# Altium PCB differential receiver.PcbDoc
Units mm, origin at the board's own origin, x right, y up, seen from the top; angles counter-clockwise.
Board outline 58 x 48 mm, 4 copper layers (Top Layer, Layer 1, Layer 2, Bottom Layer), stack 1.585 mm thick; 35 components, 22 nets, 115 pads, 79 vias.
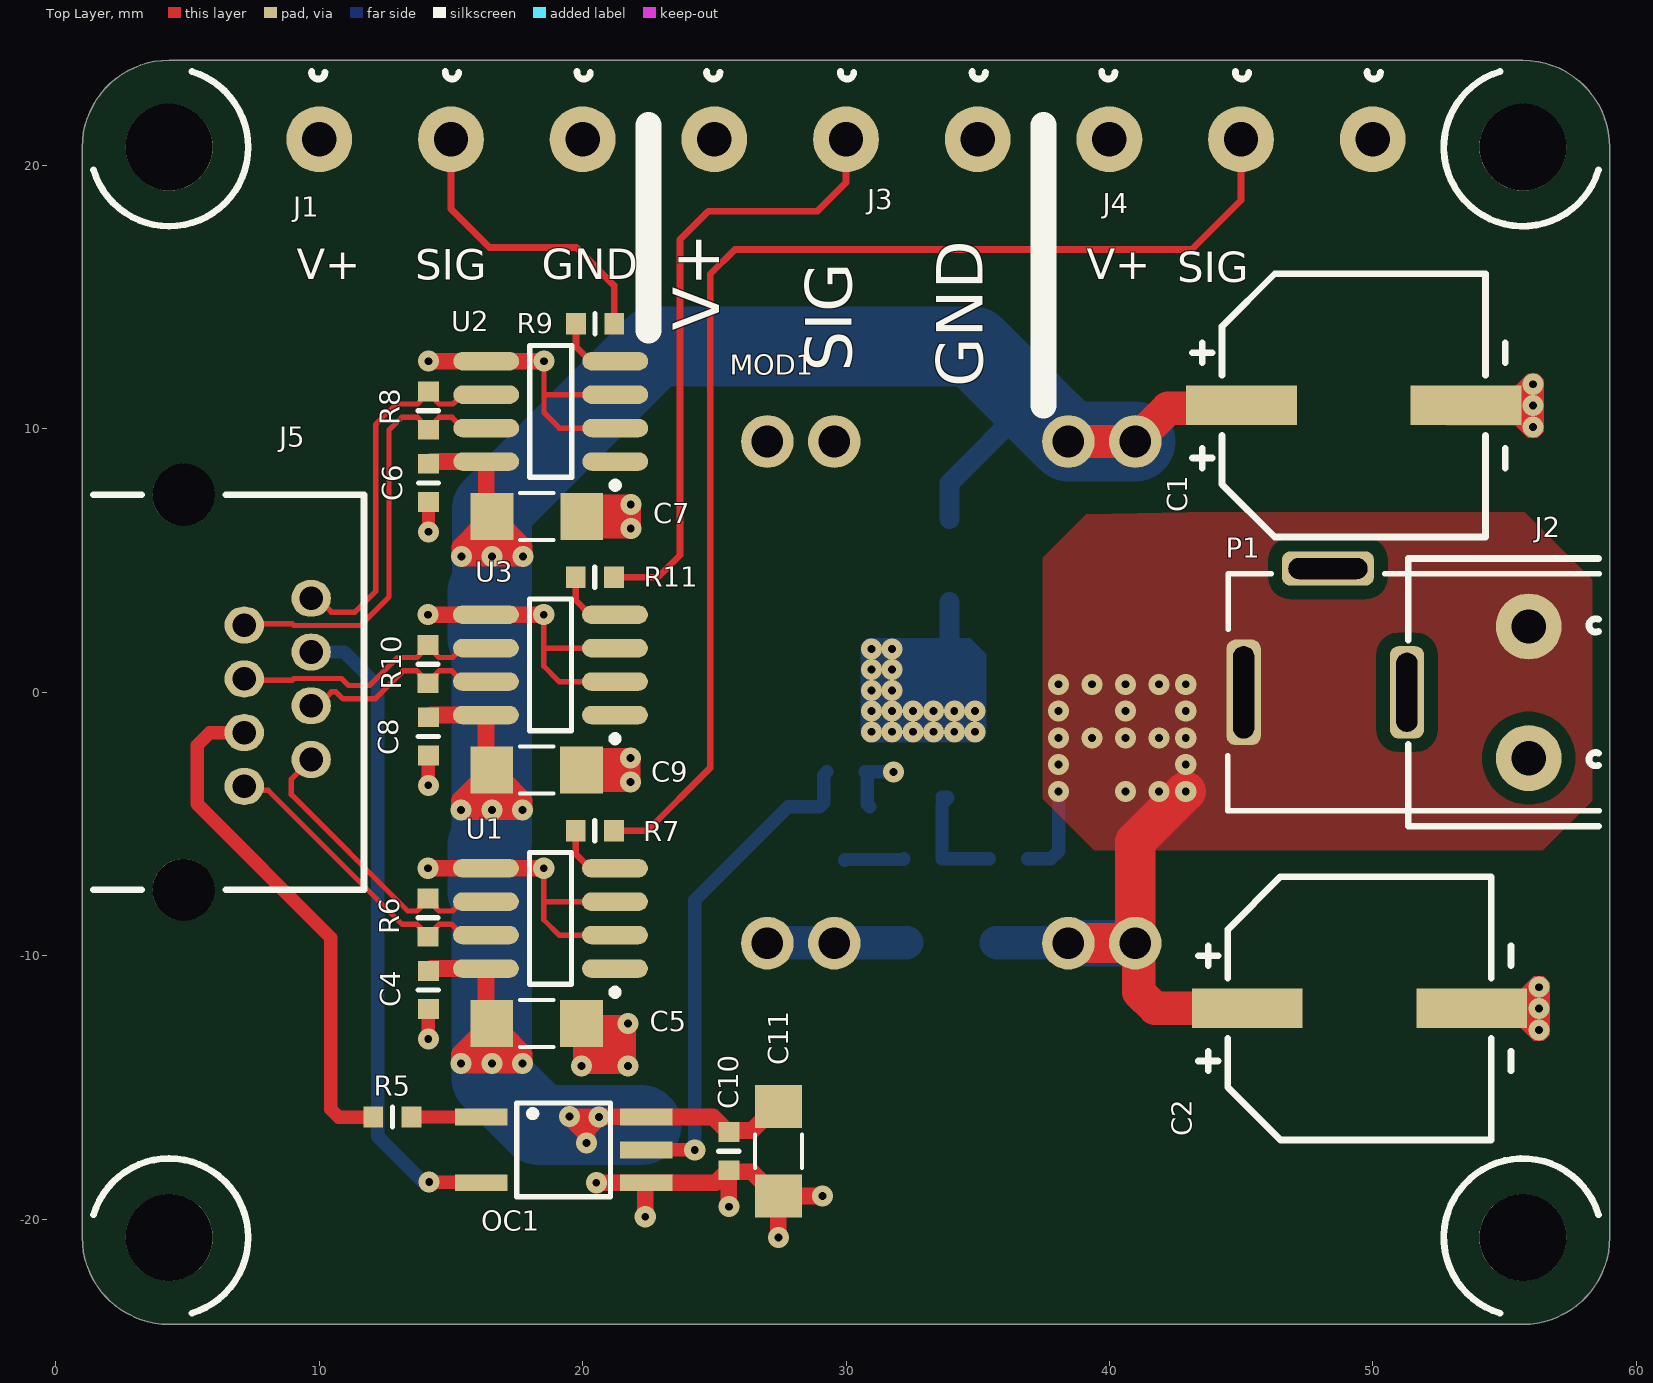
[diagram p0: Top Layer view]
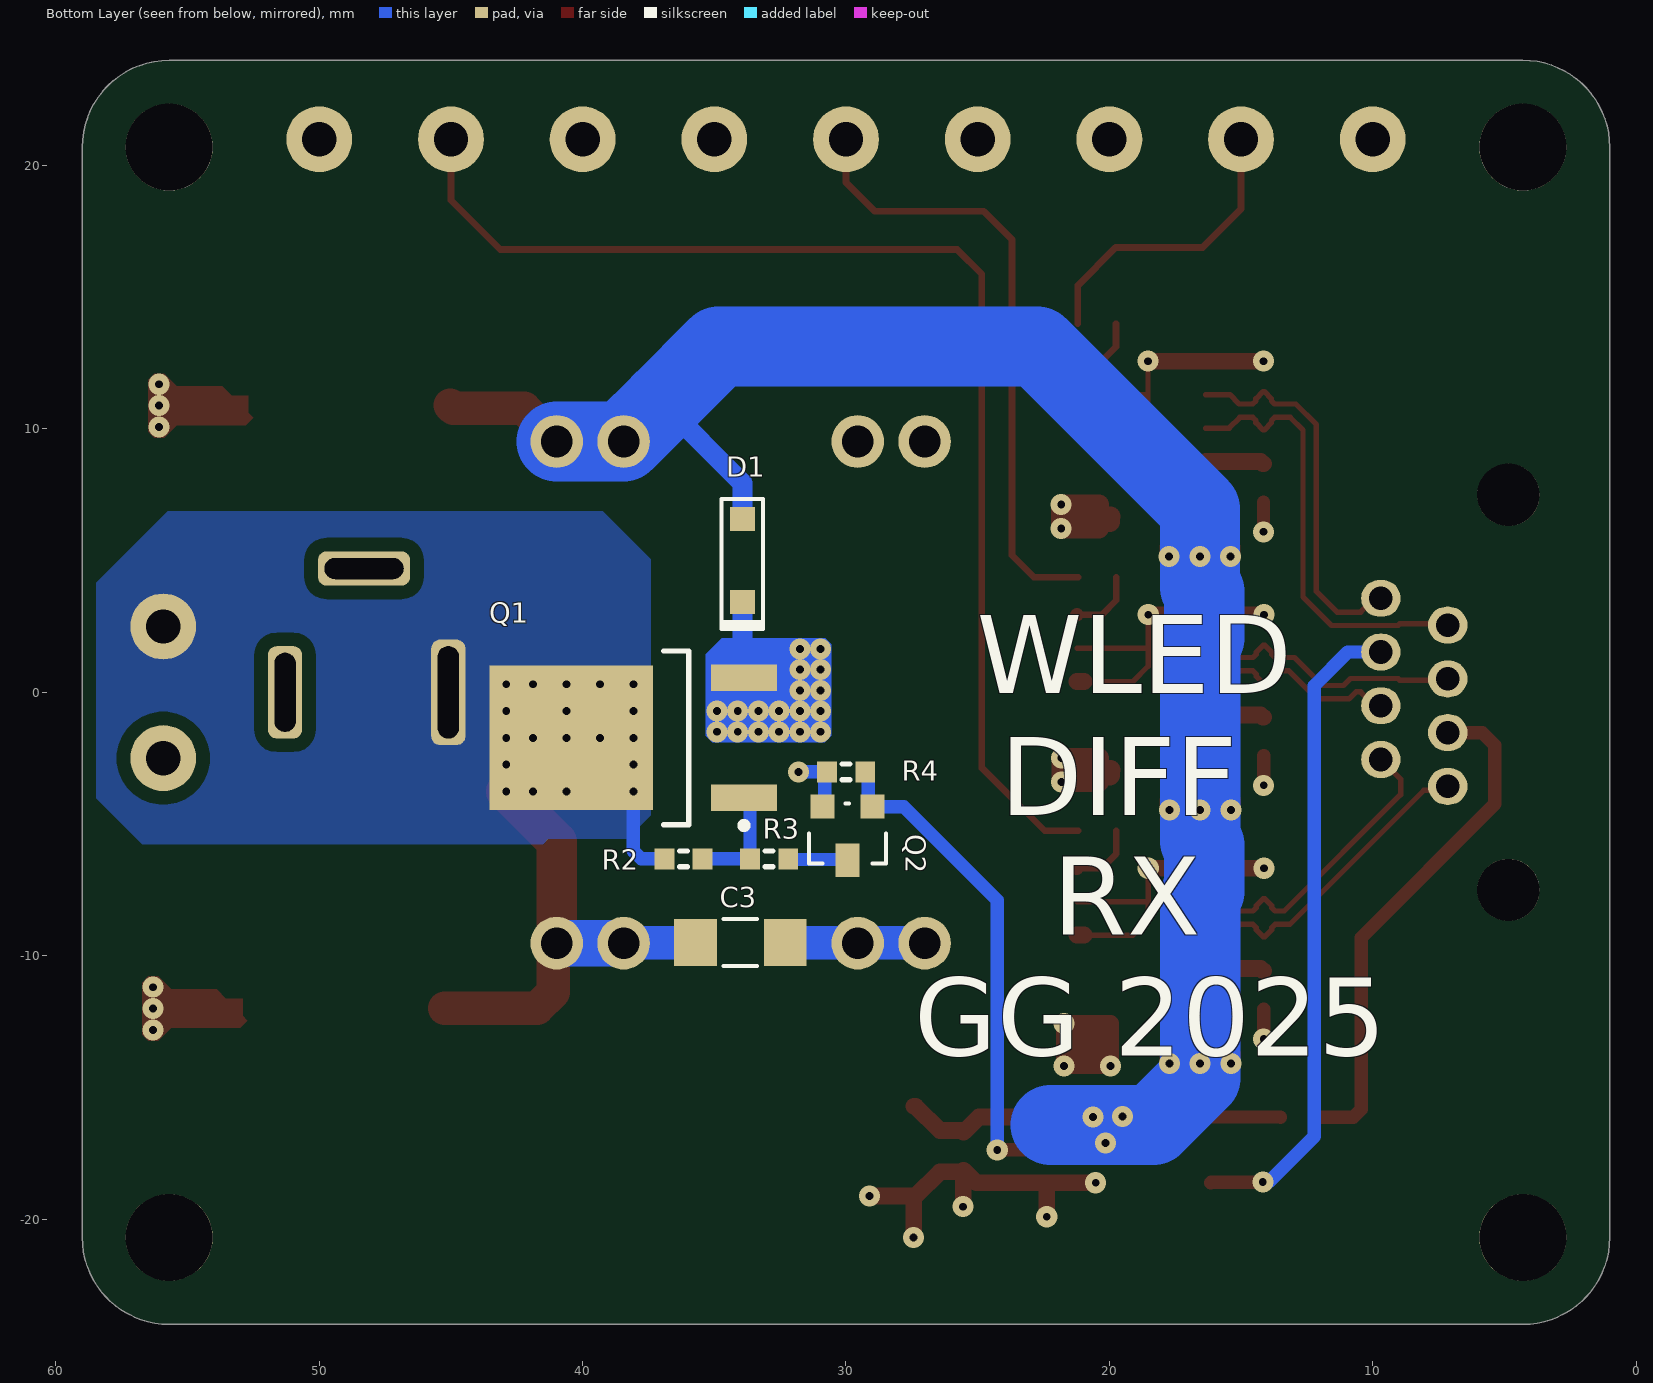
[diagram p1: Bottom Layer view, seen from below]
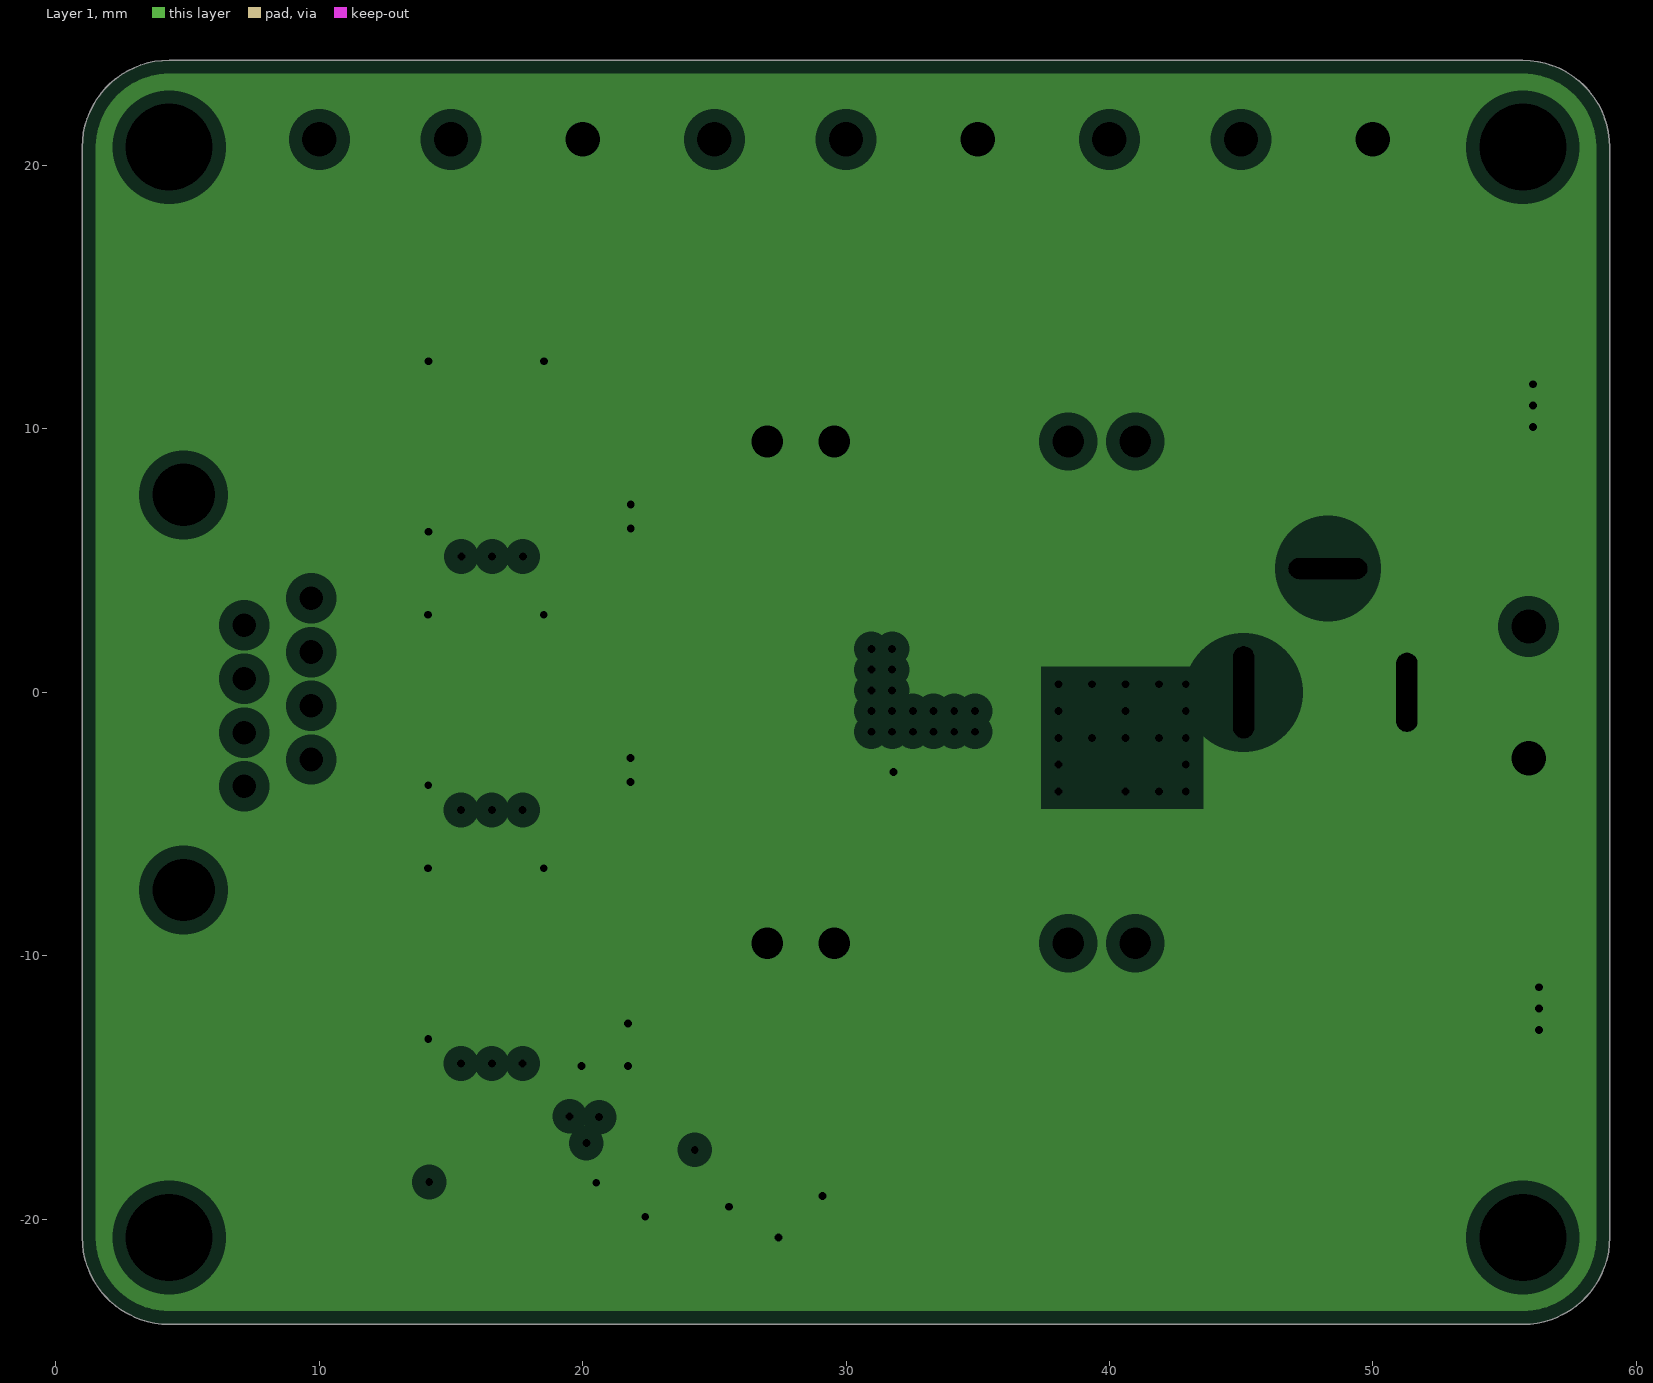
[diagram p2: Layer 1, clearances drawn from the general rule]
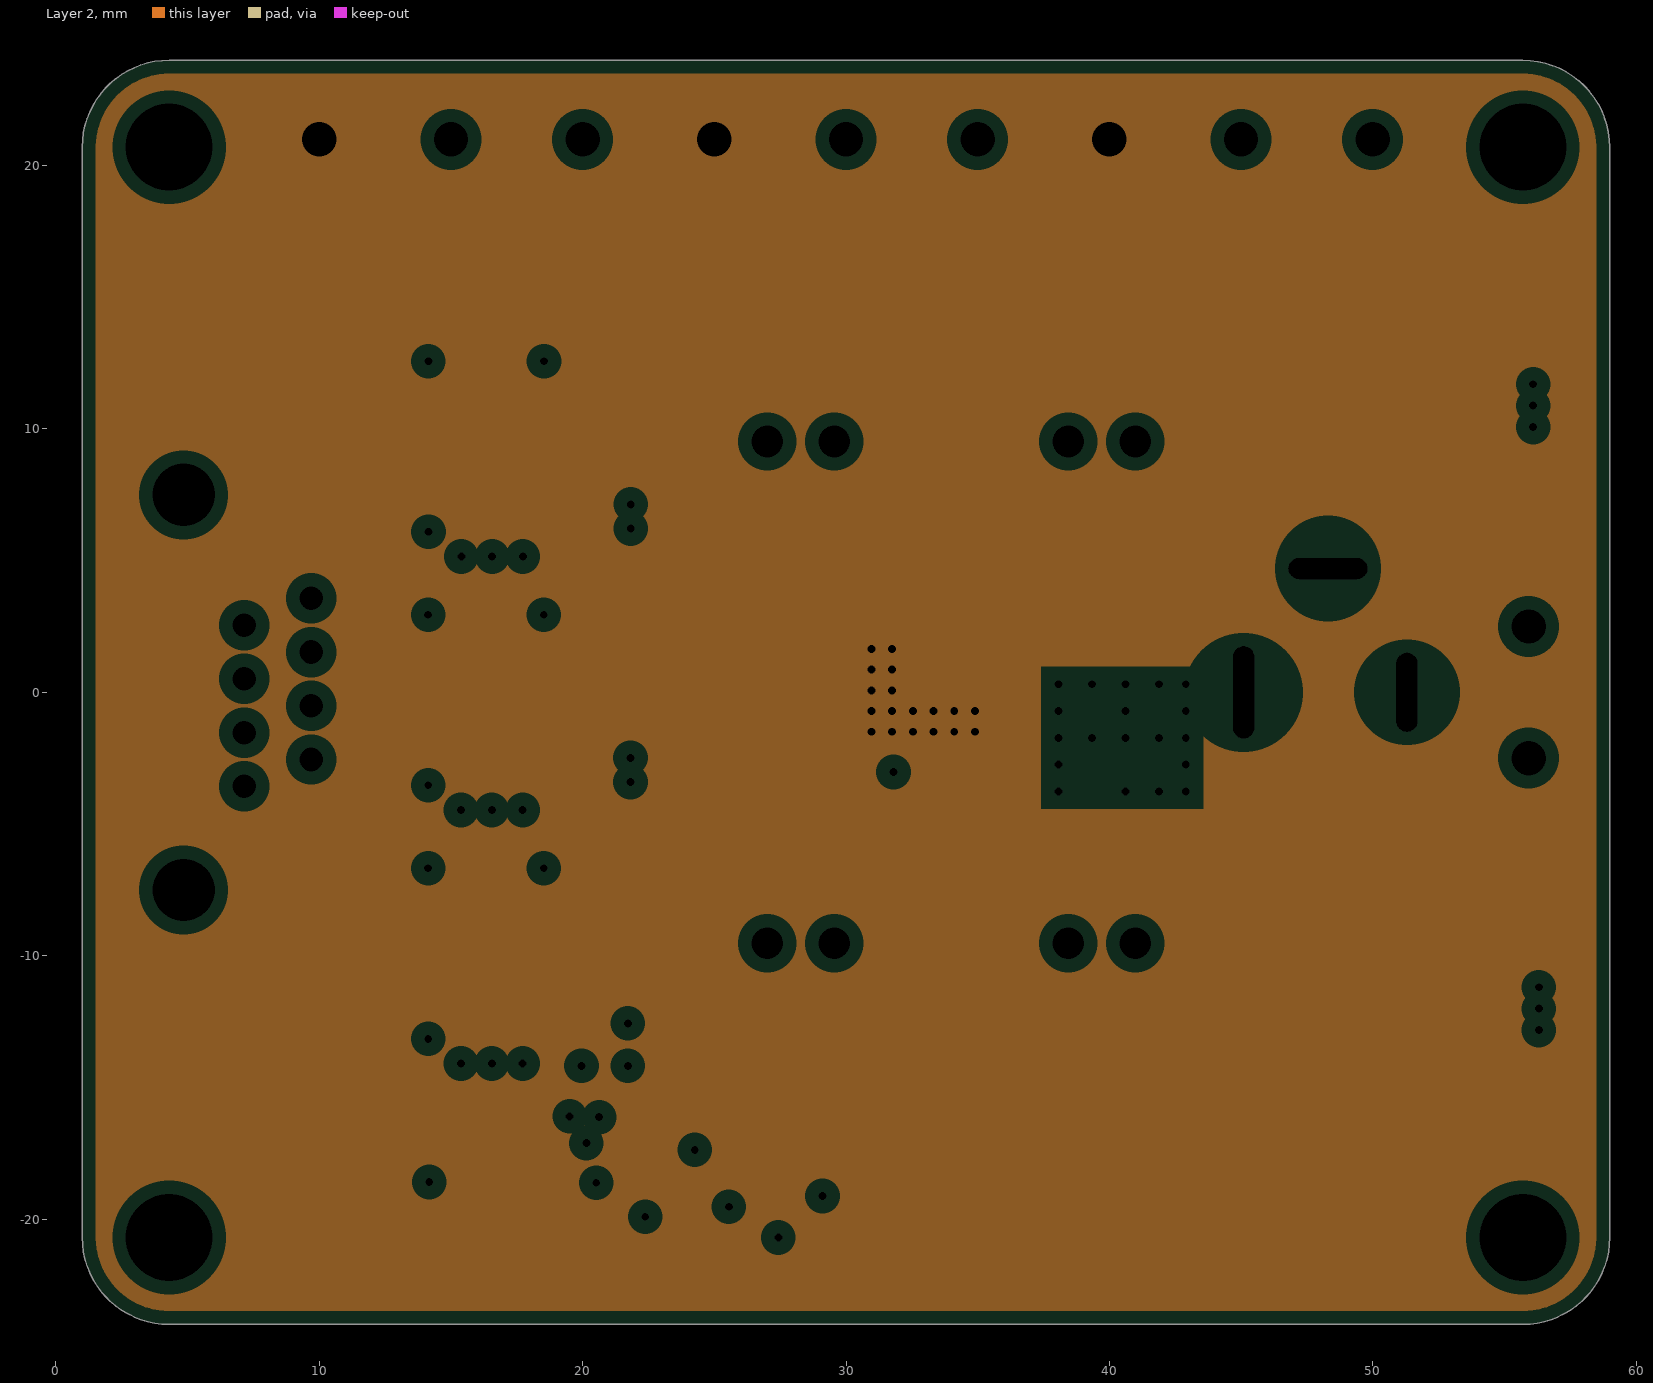
[diagram p3: Layer 2, clearances drawn from the general rule]
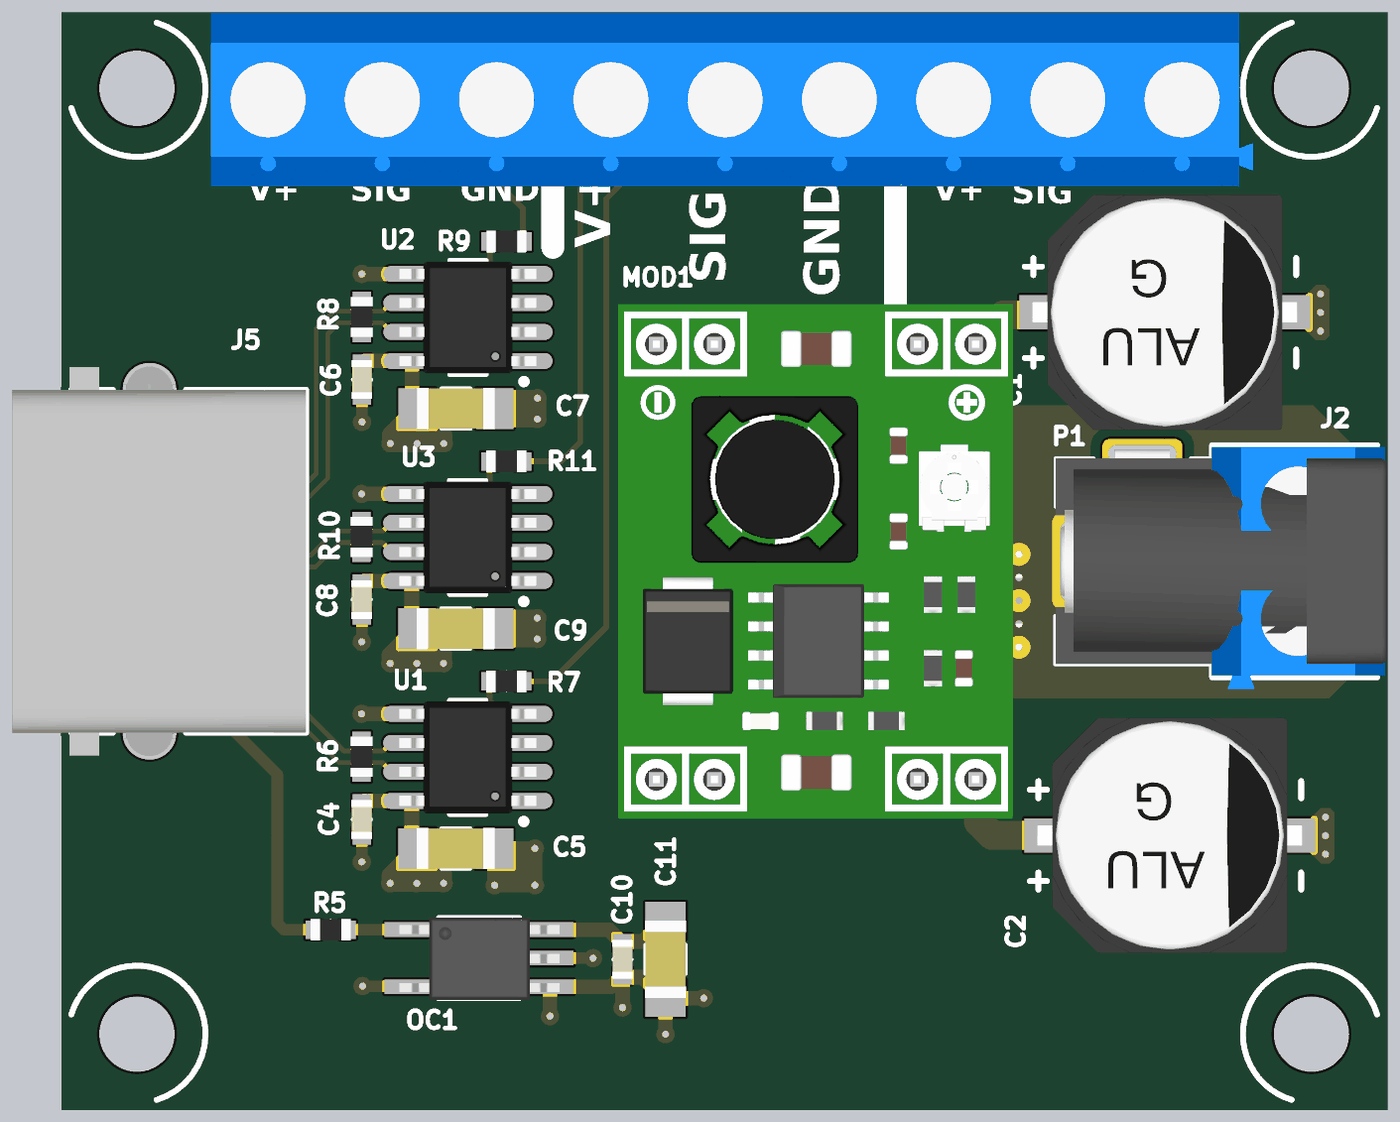
[diagram p4: 3D render of the assembled board from above, using the file's embedded part models]
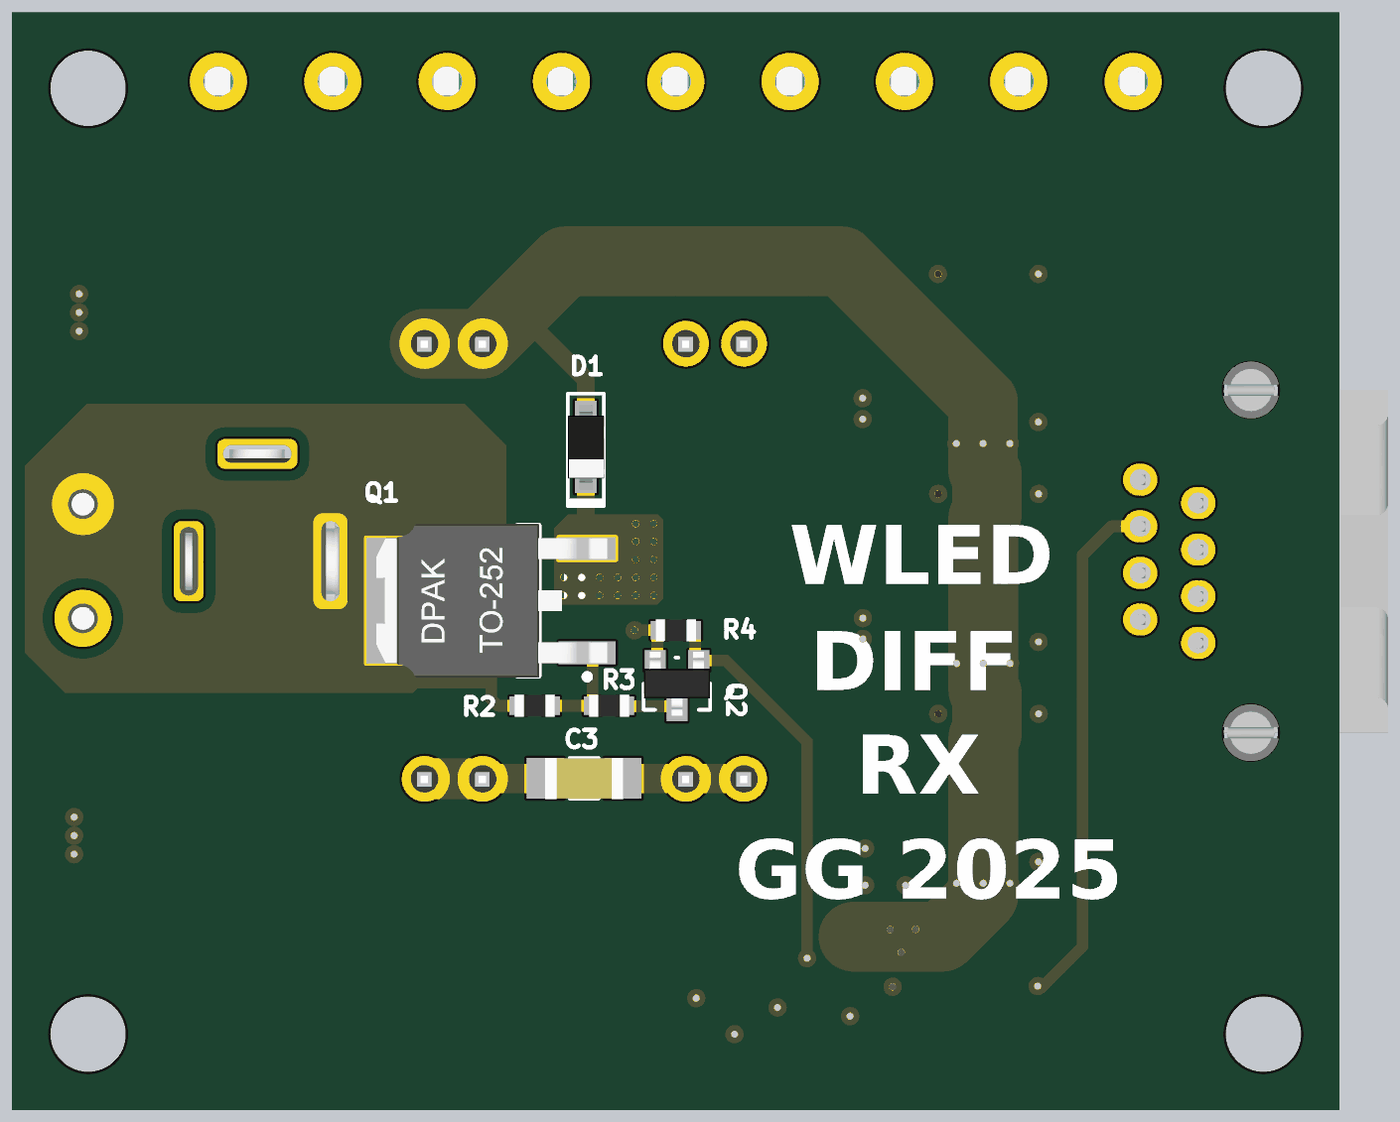
[diagram p5: 3D render of the assembled board from below, using the file's embedded part models]

## Layer stack, top to bottom
Top Solder: solder mask 0.0102, Solder Resist, Dk 3.5
Top Layer: signal copper 0.035
Dielectric 2: prepreg 0.21, PP-006, Dk 4.1
Layer 1: plane copper 0.0152, net GND
Dielectric 1: dielectric 1.065, FR-4, Dk 4.8
Layer 2: plane copper 0.0152, net VLED
Dielectric 3: prepreg 0.21, PP-006, Dk 4.1
Bottom Layer: signal copper 0.035
Bottom Solder: solder mask 0.0102, Solder Resist, Dk 3.5

## Board outline
1,-20.7 1,20.7 cw(c4.3,20.7) 4.3,24 55.7,24 cw(c55.7,20.7) 59,20.7 59,-20.7 cw(c55.7,-20.7) 55.7,-24 4.3,-24 cw(c4.3,-20.7)

## Design rules (kind name [scope] priority, off if disabled: settings)
BoardOutlineClearance [All] p1: gap=0.3 ignorepadtopadclearanceinfootprint=FALSE
Clearance Clearance_polygon [InPolygon] p1: gap=0.508 ignorepadtopadclearanceinfootprint=FALSE
Clearance [All] p2: gap=0.203 ignorepadtopadclearanceinfootprint=TRUE
ComponentClearance ComponentClearance_1 [InComponent('R6') vs InComponent('R8')] p1: gap=-1 collisioncheckmode=3 verticalgap=-1 showdistances=FALSE
ComponentClearance ComponentClearance_3 [HasFootprint('J_ARK3') vs HasFootprint('J_ARK3')] p2: gap=-1 collisioncheckmode=3 verticalgap=-1 showdistances=FALSE
ComponentClearance ComponentClearance_2 [HasFootprint('J_ARK2') vs HasFootprint('P_KLDX-0202-A')] p3: gap=-1 collisioncheckmode=3 verticalgap=-1 showdistances=FALSE
ComponentClearance [All] p4: gap=0.254 collisioncheckmode=3 verticalgap=0.254 showdistances=FALSE
DiffPairsRouting [All] p1: maxlimit=0.305 minlimit=0.305 mostfreqgap=0.305 toplayer_minwidth=0.203 toplayer_maxwidth=0.203 toplayer_prefwidth=0.203 bottomlayer_minwidth=0.203 bottomlayer_maxwidth=0.203 bottomlayer_prefwidth=0.203 impedanceprofiledriven=TRUE impedanceprofileid={ECD16B01-29DE-49CF-9F52-DB93BFE337B0} impedanceprofilevalue=120.000000 maxuncoupledlength=12.7
HoleSize [All] p1: absolutevalues=TRUE maxlimit=4 minlimit=0.3 maxpercent=80.000 minpercent=20.000
MinimumAnnularRing [All] p1: minimumring=0.178
MinimumSolderMaskSliver [All] p1: minsoldermaskwidth=0.127
PlaneClearance [All] p1: clearance=0.508
PlaneConnect [All] p1: planeconnectstyle=Direct reliefexpansion=0.508 reliefentries=4 reliefconductorwidth=0.254 reliefairgap=0.254
PolygonConnect VIA [IsVia] p1: connectstyle=Direct reliefconductorwidth=0.254 reliefentries=4 polygonreliefangle="90 Angle" airgapwidth=0.254
PolygonConnect [All] p2: connectstyle=Direct reliefconductorwidth=0.762 reliefentries=4 polygonreliefangle="90 Angle" airgapwidth=0.381
RoomDefinition P3 [InComponentClass('P3')] p1: confinementstyle=ConfineIn formatcopy=TRUE lockcomponents=FALSE outline 13.31,-4.42 23.317,-4.42 23.317,5.207 13.31,5.207
RoomDefinition P2 [InComponentClass('P2')] p2: confinementstyle=ConfineIn formatcopy=TRUE lockcomponents=FALSE outline 13.319,5.206 23.326,5.206 23.326,14.833 13.319,14.833
RoomDefinition P1 [InComponentClass('P1')] p3: confinementstyle=ConfineIn formatcopy=TRUE lockcomponents=FALSE outline 13.31,-14.046 23.317,-14.046 23.317,-4.42 13.31,-4.42
RoutingVias [All] p1: holewidth=0.3 width=0.8 viastyle="Through Hole" minholewidth=0.3 minwidth=0.8 maxholewidth=0.3 maxwidth=0.8
SilkToSilkClearance [All] p1: silktosilkclearance=0.025
SilkToSolderMaskClearance [IsPad] p1: minsilkscreentomaskgap=0.025 clearancetoexposedcopper=TRUE
SolderMaskExpansion [All] p1: expansion=0.102 istentingtop=FALSE
SupplyNets "Schematic Supply Nets_3" [InNet('RJ_GND')] p1: voltage=0.000
SupplyNets "Schematic Supply Nets_1" [InNet('VLED')] p2: voltage=0.000
SupplyNets "Schematic Supply Nets_5" [InNet('VIN')] p3: voltage=0.000
SupplyNets "Schematic Supply Nets_2" [InNet('GND')] p4: voltage=0.000
SupplyNets "Schematic Supply Nets" [InNet('+5V')] p5: voltage=0.000
Width [All] p1: maxlimit=3.81 minlimit=0.178 preferedwidth=0.254 minimp=50.000000 maximp=50.000000 favimp=50.000000
22 further rules are at their usual default settings.

## Classes and differential pairs
channel class RS422_RX: P1 P2 P3
component class P3: C8 C9 R10 R11 U3
component class P2: C6 C7 R8 R9 U2
component class P1: C4 C5 R6 R7 U1
component class "differential receiver": C1 C2 C3 C10 C11 D1 J1 J2 J3 J4 J5 MOD1 OC1 P1 Q1 Q2 R2 R3 R4 R5
differential pair P3: +P3_P -P3_N
differential pair P2: +P2_P -P2_N
differential pair P1: +P1_P -P1_N

## Components (designator, comment, footprint, x,y, rotation, side; value= is the part's Value field where it differs from the comment)
C1 "Electrolytic Capacitor" CE_D_10x10_SMD 49.281,10.897 r0 top value=100uF (schematic designator C2)
C2 "Electrolytic Capacitor" CE_D_10x10_SMD 49.5,-12 r0 top value=100uF (schematic designator C1)
C3 "Ceramic X7R" C_1206_3216 34.011,-9.5 r180 bottom value=10uF
C4 "Ceramic X7R" C_0603_1608 14.139,-11.302 r270 top value=100nF (schematic designator C3)
C5 "Ceramic X7R" C_1206_3216 18.253,-12.572 r0 top value=10uF (schematic designator C2)
C6 "Ceramic X7R" C_0603_1608 14.148,7.95 r270 top value=100nF (schematic designator C3)
C7 "Ceramic X7R" C_1206_3216 18.263,6.68 r0 top value=10uF (schematic designator C2)
C8 "Ceramic X7R" C_0603_1608 14.139,-1.676 r270 top value=100nF (schematic designator C3)
C9 "Ceramic X7R" C_1206_3216 18.253,-2.946 r0 top value=10uF (schematic designator C2)
C10 "Ceramic X7R" C_0603_1608 25.552,-17.424 r270 top value=100nF (schematic designator C4)
C11 "Ceramic X7R" C_1206_3216 27.432,-17.424 r270 top value=10uF (schematic designator C5)
D1 "1N4148W" SOD123 33.934,5.004 r90 bottom value=1N4148W-E3-08
J1 "ARK3" J_ARK3 15,21 r0 top locked value=DG301-5.0-03P-12-18A(H)
J2 "ARK2" J_ARK2 55.925,0 r270 top locked value=DG301-5.0-02P-12-18A(H) (schematic designator J9)
J3 "ARK3" J_ARK3 30,21 r0 top locked value=DG301-5.0-03P-12-18A(H) (schematic designator J2)
J4 "ARK3" J_ARK3 45,21 r0 top locked value=DG301-5.0-03P-12-18A(H) (schematic designator J3)
J5 "Modular Connector, Modular Jack, 1 x 1 (Port), 8P8C, Cat3" J_RJ45_MJ3225-88-0 6,0 r270 top value=MJ3225-88-0 (schematic designator J4)
MOD1 "Low cost, Aliexpress-ready DC-DC buck converter using MP1584" MOD_BUCK_MP1584 34,0 r90 top locked value=-
OC1 "Optocoupler DC-IN 1-CH Transistor With Base DC-OUT Automotive" SO-5 19.279,-17.374 r0 top value=ACPL-M43T-000E
P1 "DC JACK" P_KLDX-0202-A 51.3,0 r0 top locked value=KLDX-0202-A (schematic designator P2)
Q1 "IRLR8726PBF" DPAK_TO252-3_SC63_M 38.075,-1.727 r0 bottom
Q2 "2N7002K-7" SOT23_TO236_SC59 29.947,-5.359 r0 bottom
R2 "Resistor" R_0603_1608 36.17,-6.325 r0 bottom value=10k (schematic designator R3)
R3 "Resistor" R_0603_1608 32.918,-6.325 r180 bottom value=10k (schematic designator R4)
R4 "Resistor" R_0603_1608 29.997,-3.023 r0 bottom value=10k (schematic designator R5)
R5 "Resistor" R_0603_1608 12.776,-16.129 r0 top value=1.6k (schematic designator R7)
R6 "Resistor" R_0603_1608 14.129,-8.559 r90 top value=120R (schematic designator R1)
R7 "Resistor" R_0603_1608 20.463,-5.257 r180 top value=100R (schematic designator R2)
R8 "Resistor" R_0603_1608 14.139,10.694 r90 top value=120R (schematic designator R1)
R9 "Resistor" R_0603_1608 20.472,13.995 r180 top value=100R (schematic designator R2)
R10 "Resistor" R_0603_1608 14.129,1.068 r90 top value=120R (schematic designator R1)
R11 "Resistor" R_0603_1608 20.463,4.369 r180 top value=100R (schematic designator R2)
U1 "Transceiver" SOP8_SO8_SOIC8_4X5X18 18.778,-8.584 r180 top value=SN65HVD1782D
U2 "Transceiver" SOP8_SO8_SOIC8_4X5X18 18.787,10.669 r180 top value=SN65HVD1782D (schematic designator U1)
U3 "Transceiver" SOP8_SO8_SOIC8_4X5X18 18.778,1.043 r180 top value=SN65HVD1782D (schematic designator U1)

## Footprints (in the part's own frame and the unit in brackets; to place one, negate y for a bottom-side part, rotate by r counter-clockwise, add the part's x,y. Pads: shape width x height; smd on the part's side, far side on the other; paste and mask are expansions set on the pad)
C_0603_1608 [mm]
  rect 0.75x0.8 smd: 1(-0.725,0) 2(0.725,0)
  silkscreen extent 0,-0.38 0,0.38, body extent -0.85,-0.45 0.85,0.45, height 0.89
C_1206_3216 [mil]
  rect 64x70 smd: 1(-67,0) 2(67,0)
  silkscreen extent -25,-35 25,35, body extent -67,-35 67,35, height 39
CE_D_10x10_SMD [mm]
  rect 4.2x1.5 smd: 1(-4.262,0) 2(4.262,0)
  silkscreen extent -6.13,-5 5.75,5, body extent -5.8,-5.15 5.8,5.15, height 10.21
DPAK_TO252-3_SC63_M [mm] "D-PAK, 3-Pads+1-heatsink, Body 6,20x6,60mm (max), IPC Medium Density"
  rect 2.5x1 smd: 1(-4.2,2.28) 3(-4.2,-2.28)
  rect 6.2x5.5 smd: 2(2.362,0)
  silkscreen extent -4.32,-3.3 -1.15,3.45, body extent -5.08,-3.37 5.02,3.37, height 2.37
J_ARK2 [mm]
  round 2.5 hole 1.3: 1(-2.5,0) 2(2.5,0)
  silkscreen extent -5.08,-4.57 5.08,2.65, body extent -5,-4.6 5.6,3, height 10.05
J_ARK3 [mm]
  round 2.5 hole 1.3: 1(-5,0) 2(0,0) 3(5,0)
  silkscreen extent -5.29,2.29 5.29,2.57, body extent -7.46,-4.6 8.14,3, height 10.05
J_RJ45_MJ3225-88-0 [mm]
  oval 1.4x1.5 hole 0.9: 1(3.57,1.15) 2(2.55,3.69) 3(1.53,1.15) 4(0.51,3.69) 5(-0.51,1.15) 6(-1.53,3.69) 7(-2.55,1.15) 8(-3.57,3.69)
  round 2.36 hole 2.36 unplated: DNC(-7.5,-1.15) DNC(7.5,-1.15)
  silkscreen extent -7.5,-4.57 7.5,5.7, body extent -8.75,-7.15 8.75,5.7, height 14.5
MOD_BUCK_MP1584 [mm] "Normal"
  round 2 hole 1.2: 1(-9.525,-6.985) 2(-9.525,-4.445) 3(-9.525,4.445) 4(-9.525,6.985) 5(9.525,-6.985) 6(9.525,-4.445) 7(9.525,4.445) 8(9.525,6.985)
  body extent -11.25,-8.65 11.25,8.65, height 6.69
P_KLDX-0202-A [mm] "Connector; DC JACK"
  rrect50% 1.3x4 hole 0.8 slot 3.5 at 90 deg: 1(-6.2,0)
  rrect50% 1.3x3.5 hole 0.8 slot 3 at 90 deg: 2(0,0)
  rrect50% 3.5x1.3 hole 0.8 slot 3 at 0 deg: 3(-3,4.7)
  silkscreen extent -6.8,-4.5 7.3,4.5, body extent -6.8,-4.5 7.7,4.9, height 10.8
R_0603_1608 [mm]
  rect 0.75x0.8 smd: 1(-0.725,0) 2(0.725,0)
  silkscreen extent -0.15,-0.3 0.15,0.3, body extent -0.87,-0.47 0.88,0.48, height 0.54
SO-5 [mm]
  rect 2x0.64 smd: 1(-3.135,1.25) 3(-3.135,-1.25) 4(3.135,-1.25) 5(3.135,0) 6(3.135,1.25)
  silkscreen extent -1.78,-1.78 1.78,1.78, body extent -3.48,-1.82 3.52,1.78, height 2.45
SOD123 [mm]
  rect 0.9x0.95 smd: 1(-1.575,0) 2(1.575,0)
  silkscreen extent -2.59,-0.79 2.34,0.79, body extent -1.86,-0.81 1.84,0.79, height 1.27
SOP8_SO8_SOIC8_4X5X18 [mm]
  oval 2.5x0.7 smd: 1(-2.45,1.905) 2(-2.45,0.635) 3(-2.45,-0.635) 4(-2.45,-1.905) 5(2.45,-1.905) 6(2.45,-0.635) 7(2.45,0.635) 8(2.45,1.905)
  silkscreen extent -2.58,-2.5 0.8,2.93, body extent -3,-2.45 3,2.45, height 1.7
SOT23_TO236_SC59 [mil]
  rect 36x36 smd: 1(-37.5,-40) 2(37.5,-40)
  rect 36x50 smd: 3(0,40)
  silkscreen extent -57,-45 58,45, body extent -57,-55 57,55, height 51

## Part data
C1 C2: library part CE_100uF_50V_AL2O3_10x10_20, "Polarized Capacitor", Dielectric=AL2O3, Manufacturer=Nichicon, Manufacturer Part Number=UUX1H101MNL1GS, Tolerance (%)=20, Voltage=50V, HelpURL=https://datasheet.octopart.com/UUX1H101MNL1GS-Nichicon-datasheet-62047998.pdf, Part Number=CE_100uF_50V_AL2O3_10x10_20, SCH_Footprint=10x10, Supplier 1=TME, Supplier 2="RS Components", Supplier 3=Farnell, Supplier 4=Mouser, Supplier 5=Digi-Key, Supplier 6=LCSC, Supplier Part Number 1=UUX1H101MNL1GS, Supplier Part Number 2=7393107, Supplier Part Number 3=2841943, Supplier Part Number 4=647-UUX1H101MNL1GS, Supplier Part Number 5=493-6269-1-ND
C3 C5 C7 C9 C11: library part C_10uF_25V_X7R_1206_10, "Capacitor", Dielectric=X7R, Manufacturer=Samsung, Manufacturer Part Number=CL31B106KAHNNNE, Tolerance (%)=10, Voltage=25V, HelpURL=http://www.tme.eu/pl/Document/4a42202b32dab16128fe107dd69598cc/samsung-chip-cap.pdf, Part Number=C_10uF_25V_X7R_1206_10, SCH_Footprint=1206, Supplier 1=TME, Supplier 2="RS Components", Supplier 3=Farnell, Supplier 4=Mouser, Supplier 5=Digi-Key, Supplier 6=LCSC, Supplier Part Number 1=CL31B106KAHNNNE, Supplier Part Number 2=766-6773, Supplier Part Number 3=3013526, Supplier Part Number 4=187-CL31B106KAHNNNE, Supplier Part Number 5=1276-1804-1-ND
C4 C6 C8 C10: library part C_100nF_50V_X7R_0603_5, "Capacitor", Dielectric=X7R, Manufacturer=Samsung, Manufacturer Part Number=CL10B104JB8NNNC, Tolerance (%)=5, Voltage=50V, HelpURL=http://www.tme.eu/pl/Document/4a42202b32dab16128fe107dd69598cc/samsung-chip-cap.pdf, Part Number=C_100nF_50V_X7R_0603_5, SCH_Footprint=0603, Supplier 1=TME, Supplier 2="RS Components", Supplier 3=Farnell, Supplier 4=Mouser, Supplier 5=Digi-Key, Supplier 6=LCSC, Supplier Part Number 1=CL10B104JB8NNNC, Supplier Part Number 2=7665455, Supplier Part Number 5=1276-1033-1-ND, Supplier Part Number 6=C24452
D1: library part D_1N4148W_0A15_75V_SOD123, Current=0.15A, Manufacturer=Vishay, Manufacturer Part Number=1N4148W-E3-08, Voltage=75, HelpURL=https://datasheet.octopart.com/1N4148W-E3-08-Vishay-datasheet-17291302.pdf, Part Number=D_1N4148W_0A15_75V_SOD123, SCH_Footprint=SOD123, Supplier 1=TME, Supplier 2="RS Components", Supplier 3=Farnell, Supplier 4=Mouser, Supplier 5=Digi-Key, Supplier 6=LCSC, Supplier Part Number 1=1N4148W-E3-08, Supplier Part Number 2=7003671, Supplier Part Number 3=2433353, Supplier Part Number 4=78-1N4148W-E3-08, Supplier Part Number 5=1N4148W-E3-08CT-ND
J1 J3 J4: library part J_TB-5.0-P-3P, "ARK Screw terminal, 3-Pin", Manufacturer="DEGSON ELECTRONICS", Manufacturer Part Number=DG301-5.0-03P-12-18A(H), Supplier Part Number 1=DG301-5.0-3/6B, HelpURL=https://datasheet.octopart.com/DG301-5.0-03P-12-18A%28H%29-Degson-datasheet-17801202.pdf, Part Number=J_TB-5.0-P-3P, SCH_Footprint=ARK3, Supplier 1=TME, Supplier 2="RS Components", Supplier 3=Farnell, Supplier 4=Mouser, Supplier 5=Digi-Key, Supplier 6=LCSC
J2: library part J_TB-5.0-P-2P, "ARK Screw terminal, 2-Pin", Manufacturer="DEGSON ELECTRONICS", Manufacturer Part Number=DG301-5.0-02P-12-18A(H), Supplier Part Number 1=DG301-5.0-2/6B, HelpURL=https://datasheet.octopart.com/DG301-5.0-03P-12-18A%28H%29-Degson-datasheet-17801202.pdf, Part Number=J_TB-5.0-P-2P, SCH_Footprint=ARK2, Supplier 1=TME, Supplier 2="RS Components", Supplier 3=Farnell, Supplier 4=Mouser, Supplier 5=Digi-Key, Supplier 6=LCSC
J5: library part J_RJ45_MJ3225-88-0, Manufacturer="Global Connector Technology", Manufacturer Part Number=MJ3225-88-0, HelpURL=https://www.farnell.com/cad/3781788.pdf, Part Number=J_RJ45_MJ3225-88-0, SCH_Footprint=J_RJ45, Supplier 1=TME, Supplier 2="RS Components", Supplier 3=Farnell, Supplier 4=Mouser, Supplier 5=Digi-Key, Supplier 6=LCSC, Supplier 7=Newark, Supplier Part Number 3=4071641, Supplier Part Number 7=61AK4308
MOD1: library part MOD_BUCK_MP1584, Manufacturer=-, HelpURL=https://pl.aliexpress.com/item/32341006065.html, Manufacturer Part Number=-, Part Number=MOD_BUCK_MP1584, SCH_Footprint=17.3x22.5mm, Supplier 1=TME, Supplier 2="RS Components", Supplier 3=Farnell, Supplier 4=Mouser, Supplier 5=Digi-Key, Supplier 6=LCSC, Supplier 7=-, Supplier Part Number 7=-
OC1: library part OC_ACPL-M43T-000E, Manufacturer=Broadcom, Manufacturer Part Number=ACPL-M43T-000E, HelpURL=https://datasheet.octopart.com/ACPL-M43T-000E-Broadcom-datasheet-68302489.pdf, Part Number=OC_ACPL-M43T-000E, SCH_Footprint=SO-5, Supplier 1=TME, Supplier 2="RS Components", Supplier 3=Farnell, Supplier 4=Mouser, Supplier 5=Digi-Key, Supplier 6=LCSC, Supplier Part Number 3=1244509, Supplier Part Number 4=630-ACPL-M43T-000E, Supplier Part Number 5=516-2256-5-ND
P1: library part P_KLDX-0202-A, "Typical 3-pin jack power connector with switch", Manufacturer=Kycon, Manufacturer Part Number=KLDX-0202-A, HelpURL=http://www.kycon.com/2013Catalogpage/DC%20Power/KLDX_0202.pdf, Part Number=P_KLDX-0202-A, SCH_Footprint=THT, Supplier 1=TME, Supplier 2="RS Components", Supplier 3=Farnell, Supplier 4=Mouser, Supplier 5=Digi-Key, Supplier 6=LCSC, Supplier Part Number 3=2839850, Supplier Part Number 4=806-KLDX-0202-A, Supplier Part Number 5=2092-KLDX-0202-A-ND
Q1: library part QNS_IRLR8726PBF, Current=86A, Manufacturer=Infineon, Voltage=30V, HelpURL=http://www.mouser.com/ds/2/196/irlr8726pbf-938054.pdf, Manufacturer Part Number=IRLR8726PBF, Part Number=QNS_IRLR8726PBF, SCH_Footprint=DPAK, Supplier 1=TME, Supplier 2="RS Components", Supplier 3=Farnell, Supplier 4=Mouser, Supplier 5=Digi-Key, Supplier 6=LCSC, Supplier Part Number 1=IRLR8726PBF, Supplier Part Number 4=942-IRLR8726PBF, Supplier Part Number 5=IRLR8726PBF-ND, Type=N-MOS
Q2: library part QN_2N7002K-7, Current=0A8, Manufacturer="Diodes Inc", Voltage=60V, HelpURL=http://datasheet.octopart.com/2N7002K-7-Diodes-Inc.-datasheet-12515815.pdf, Manufacturer Part Number=2N7002K-7, Part Number=QN_2N7002K-7, SCH_Footprint=SOT23, Supplier 1=TME, Supplier 2="RS Components", Supplier 3=Farnell, Supplier 4=Mouser, Supplier 5=Digi-Key, Supplier 6=LCSC, Supplier Part Number 2=7703383, Supplier Part Number 3=1713825, Supplier Part Number 4=621-2N7002K-7, Supplier Part Number 5=2N7002K-7DICT-ND, Type=N-MOS
R2 R3 R4: library part R_10k_0603_1, Manufacturer=Vishay, Manufacturer Part Number=CRCW060310K0FKTA, Power=100mW, Supplier Part Number 1=CRCW060310K0FKTABC, Tolerance=1%, Voltage=75V, HelpURL=https://octopart.com/datasheet/crcw060310k0fkta-vishay-39447548, Part Number=R_10k_0603_1, SCH_Footprint=0603, Supplier 1=TME, Supplier 2="RS Components", Supplier 3=Farnell, Supplier 4=Mouser, Supplier 5=Digi-Key, Supplier 6=LCSC, Supplier Part Number 3=1652827, Supplier Part Number 4=71-CRCW0603-10K, Supplier Part Number 5=541-2980-1-ND
R5: library part R_1.6k_0603_1_AECQ0, Manufacturer=Panasonic, Manufacturer Part Number=ERJ-3EKF1601V, Power=100mW, Supplier Part Number 1=ERJ3EKF1601V, Tolerance=1%, Voltage=75V, HelpURL=https://industrial.panasonic.com/cdbs/www-data/pdf/RDA0000/AOA0000C304.pdf, Part Number=R_1.6k_0603_1_AECQ0, SCH_Footprint=0603, Supplier 1=TME, Supplier 2="RS Components", Supplier 3=Farnell, Supplier 4=Mouser, Supplier 5=Digi-Key, Supplier 6=LCSC, Supplier Part Number 3=2303159, Supplier Part Number 4=667-ERJ-3EKF1601V, Supplier Part Number 5=P1.60KHCT-ND
R6 R8 R10: library part R_120R_0603_1_AECQ0, Manufacturer=Panasonic, Manufacturer Part Number=ERJ-3EKF1200V, Power=100mW, Supplier Part Number 1=ERJ3EKF1200V, Tolerance=1%, Voltage=75V, HelpURL=https://industrial.panasonic.com/cdbs/www-data/pdf/RDA0000/AOA0000C304.pdf, Part Number=R_120R_0603_1_AECQ0, SCH_Footprint=0603, Supplier 1=TME, Supplier 2="RS Components", Supplier 3=Farnell, Supplier 4=Mouser, Supplier 5=Digi-Key, Supplier 6=LCSC, Supplier Part Number 3=2303067, Supplier Part Number 4=667-ERJ-3EKF1200V, Supplier Part Number 5=P120HCT-ND, Supplier Part Number 6=C169257
R7 R9 R11: library part R_100R_0603_1, Manufacturer=Yageo, Manufacturer Part Number=RC0603FR-07100RL, Power=100mW, Supplier Part Number 1=RC0603FR-07100R, Tolerance=1%, Voltage=50V, HelpURL=http://www.tme.eu/en/Document/d2a72e545e5c8eb7bf2a04fa97535928/rc0603yageo.pdf, Part Number=R_100R_0603_1, SCH_Footprint=0603, Supplier 1=TME, Supplier 2="RS Components", Supplier 3=Farnell, Supplier 4=Mouser, Supplier 5=Digi-Key, Supplier 6=LCSC, Supplier Part Number 3=2131804, Supplier Part Number 4=603-RC0603FR-07100RL, Supplier Part Number 5=311-100HRCT-ND
U1 U2 U3: library part U_SN65HVD1782DR, "Fault-Protected  RS-485  Transceivers  With 3.3-V to 5-V Operation", Manufacturer="Texas Instruments", Manufacturer Part Number=SN65HVD1782D, HelpURL=http://www.ti.com/lit/ds/slls877h/slls877h.pdf, Part Number=U_SN65HVD1782DR, SCH_Footprint=SO-8, Supplier 1=TME, Supplier 2="RS Components", Supplier 3=Farnell, Supplier 4=Mouser, Supplier 5=Digi-Key, Supplier 6=LCSC, Supplier Part Number 2=7093179P, Supplier Part Number 3=1755056, Supplier Part Number 4=595-SN65HVD1782D, Supplier Part Number 5=296-33574-5-ND

## Free pads (board coordinates)
  round 3.3 hole 3.3 unplated: ""(4.3,-20.7) ""(4.3,20.7) ""(55.7,-20.7) ""(55.7,20.7)

## Via types
v1: diameter 0.8, hole 0.3, Top Layer to Bottom Layer, tented both sides, 70 vias
v2: diameter 0.8, hole 0.3, Top Layer to Bottom Layer, 9 vias

## Nets (pads, with @x,y where several pads share a name; then routed paths per layer and width w, separated by ;. In a path a pad name is that pad's centre, name@x,y a point inside that pad or via, vN(x,y) a via of type N, cw(c..) or ccw(c..) an arc to the next point about the centre after c; other vN are vias at no path point)
+5V: C1.1 C4.1 C5.1 C6.1 C7.1 C8.1 C9.1 C10.1 C11.1 D1.2 MOD1.5 MOD1.6 OC1.6 U1.8 U2.8 U3.8 | length 119.3
  Top Layer w0.635: C4.1 14.164,-10.577 14.252,-10.489 U1.8 16.327,-10.49 16.327,-11.961 C5.1@16.325,-11.962 ; C8.1 14.164,-0.951 14.252,-0.862 U3.8 16.327,-0.864 16.327,-2.334 C9.1@16.325,-2.336 ; C6.1 14.173,8.675 14.261,8.764 U2.8 U2.8 16.336,7.292 C7.1@16.335,7.29 ; v1(20.625,-16.129) 20.625,-16.174 20.174,-16.625 20.174,-17.088 v1(20.142,-17.12) 20.111,-17.088 v1@20.111,-16.752 ; C11.1 27.356,-15.723 26.437,-16.642 25.61,-16.642 C10.1 25.527,-16.699 24.952,-16.124 OC1.6 22.411,-16.121 20.091,-16.121 ; MOD1.6 MOD1.6@38.837,9.525 ; 20.091,-16.121 19.525,-16.121 v1(19.507,-16.104) 19.507,-16.148 v1@20.111,-16.752 ; 20.091,-16.121 20.111,-16.14 v1@20.111,-16.752
  Top Layer w0.762: C5.1 v1(16.552,-14.096) ; C9.1 v1(16.552,-4.47) ; C7.1 v1(16.561,5.156) ; 15.967,-14.096 16.12,-13.944 16.12,-13.004 15.39,-13.734 15.39,-14.089 v1(15.383,-14.096) 15.967,-14.096 ; 15.967,-14.096 v1(16.552,-14.096) ; 15.967,-4.47 16.12,-4.317 16.12,-3.378 15.39,-4.107 15.39,-4.463 v1(15.383,-4.47) 15.967,-4.47 ; 15.967,-4.47 v1(16.552,-4.47) ; 15.977,5.156 v1(16.561,5.156) ; 15.977,5.156 v1(15.392,5.156) 15.4,5.163 15.4,5.519 16.129,6.248 16.129,5.309 15.977,5.156 ; v1(16.552,-14.096) 17.136,-14.096 ; v1(16.552,-4.47) 17.136,-4.47 ; v1(16.561,5.156) 17.145,5.156 ; 17.136,-14.096 16.983,-13.944 16.983,-13.004 17.713,-13.734 17.713,-14.089 v1(17.72,-14.096) 17.136,-14.096 ; 17.136,-4.47 16.983,-4.317 16.983,-3.378 17.713,-4.107 17.713,-4.463 v1(17.72,-4.47) 17.136,-4.47 ; 17.145,5.156 v1(17.729,5.156) 17.722,5.163 17.722,5.519 16.993,6.248 16.993,5.309 17.145,5.156
  Top Layer w1.27: MOD1.6@38.837,9.525 MOD1.5 40.985,9.544 42.222,10.782 44.904,10.782 C1.1
  Bottom Layer w0.762: D1.2 33.934,7.95 36.977,10.993
  Bottom Layer w3.048: 22.225,-16.434 18.337,-16.434 16.552,-14.648 v1(16.552,-14.096) 16.552,-7.715 16.396,-7.56 16.396,-5.798 16.552,-5.643 v1(16.552,-4.47) 16.552,1.911 16.396,2.066 16.396,3.829 16.561,3.993 v1(16.561,5.156) 16.561,6.96 22.733,13.132 34.838,13.132 36.977,10.993 MOD1.6 MOD1.5
GND: C1.2 C2.2 C3.2 C4.2 C5.2 C6.2 C7.2 C8.2 C9.2 C10.2 C11.2 J1.3 J2.2 J3.3 J4.3 MOD1.3 MOD1.4 MOD1.7 MOD1.8 OC1.4 P1.2 Q2.2 R4.2 U1.2 U1.3 U1.5 U2.2 U2.3 U2.5 U3.2 U3.3 U3.5 | length 82.8
  Top Layer w0.203: v1(18.524,-6.679) 18.524,-7.898 ; v1(18.524,2.948) 18.524,1.728 ; v1(18.533,12.574) 18.533,11.354 ; U1.2@20.962,-9.219 19.108,-9.219 18.524,-8.635 18.524,-7.898 ; U3.2@20.962,0.408 19.108,0.408 18.524,0.992 18.524,1.728 ; U2.2@20.971,10.034 19.117,10.034 18.533,10.618 18.533,11.354 ; U1.3 18.574,-7.949 18.524,-7.898 ; U3.3 18.574,1.678 18.524,1.728 ; U2.3 18.584,11.304 18.533,11.354
  Top Layer w0.508: v1(14.139,-13.157) C4.2 ; v1(14.139,-3.53) C8.2 ; v1(14.148,6.096) C6.2
  Top Layer w0.635: v1(14.132,-6.679) U1.5 v1(18.524,-6.679) ; v1(14.132,2.948) U3.5 v1(18.524,2.948) ; v1(14.141,12.574) U2.5 v1(18.533,12.574) ; v1(20.518,-18.624) OC1.4@22.38,-18.624 ; U1.2@20.962,-9.219 U1.2 ; U3.2@20.962,0.408 U3.2 ; U2.2@20.971,10.034 U2.2 ; v1(22.377,-19.914) 22.377,-18.626 OC1.4@22.38,-18.624 ; v1(25.552,-19.533) C10.2 ; v1@27.457,-20.726 v1(27.432,-20.701) C11.2 ; v1(29.108,-19.126) C11.2 ; C5.2@19.955,-12.649 21.457,-14.151 21.686,-14.151 v1(21.718,-14.182) ; C5.2@19.955,-12.649 C5.2 v1(21.718,-12.572) v1(21.718,-14.182) ; C5.2@19.955,-12.649 v1(19.955,-14.182) v1(21.718,-14.182) ; OC1.4@22.38,-18.624 OC1.4 25.053,-18.624 25.527,-18.149 C10.2 ; C10.2 25.61,-18.207 26.437,-18.207 27.356,-19.126 C11.2
  Top Layer w0.762: C9.2 C9.2@20.171,-2.946 ; C7.2 C7.2@20.18,6.68 ; C9.2@19.968,-3.149 C9.2@20.171,-2.946 ; C7.2@19.977,6.477 C7.2@20.18,6.68 ; C9.2@20.387,-3.395 21.811,-3.395 v1(21.819,-3.402) 21.819,-2.946 ; C7.2@20.396,6.231 21.821,6.231 v1(21.828,6.224) 21.828,6.68 ; C9.2@20.171,-2.946 20.387,-2.73 20.387,-2.496 21.811,-2.496 v1(21.819,-2.489) 21.819,-2.946 ; C9.2@20.171,-2.946 21.819,-2.946 ; C7.2@20.18,6.68 21.828,6.68 ; C7.2@20.18,6.68 20.396,6.896 20.396,7.13 21.821,7.13 v1(21.828,7.137) 21.828,6.68
  Bottom Layer w0.508: Q2.2 30.811,-4.255 30.811,-3.111 R4.2 v1(31.801,-3.023)
  Bottom Layer w1.27: MOD1.4 27.028,-9.512 32.296,-9.512 C3.2
  other v1: 56.312,-12.823 56.312,-12.01 56.312,-11.198 56.093,10.073 56.093,10.886 56.093,11.699
LED1: J4.2 R7.1 | length 47
  Top Layer w0.254: R7.1 22.454,-5.257 24.841,-2.87 24.841,15.875 25.781,16.815 43.129,16.815 45,18.686 J4.2
LED2: J1.2 R9.1 | length 11.5
  Top Layer w0.254: J1.2 15,18.35 16.459,16.891 19.761,16.891 21.197,15.455 R9.1
LED3: J3.2 R11.1 | length 23.7
  Top Layer w0.254: R11.1 22.861,4.369 23.698,5.207 23.698,17.196 24.765,18.263 28.905,18.263 30,19.357 J3.2
LED_EN: OC1.5 Q2.1 R4.1 | length 19
  Top Layer w0.508: OC1.5 v1(24.257,-17.374) v1@24.308,-17.323
  Bottom Layer w0.508: v1(24.257,-17.374) 24.257,-7.899 27.813,-4.343 Q2.1 29.151,-4.186 29.151,-3.144 R4.1
NetOC1_1: OC1.1 R5.2 | length 2.6
  Top Layer w0.508: R5.2 13.504,-16.126 16.141,-16.126 OC1.1
NetQ1_1: Q1.1 R2.1 R3.1 | length 4.5
  Bottom Layer w0.508: Q1.1@33.643,-3.985 33.852,-3.985 Q1.1 33.643,-4.238 R3.1 R2.1
NetQ2_3: Q2.3 R3.2 | length 2.3
  Bottom Layer w0.508: Q2.3 29.972,-6.35 32.168,-6.35 R3.2
NetR7_2: R7.2 U1.4 | length 2.6
  Top Layer w0.254: R7.2 19.738,-6.132 20.285,-6.679 U1.4
  Top Layer w0.508: U1.4 U1.4@21.24,-6.692
NetR9_2: R9.2 U2.4 | length 2.6
  Top Layer w0.254: R9.2 19.747,13.12 20.294,12.574 U2.4
  Top Layer w0.508: U2.4 U2.4@21.25,12.561
NetR11_2: R11.2 U3.4 | length 2.6
  Top Layer w0.254: R11.2 19.738,3.494 20.285,2.948 U3.4
  Top Layer w0.508: U3.4 U3.4@21.24,2.935
P1_N: J5.1 R6.1 U1.7 | length 12
  Top Layer w0.203: J5.1 7.304,-3.724 8.06,-3.724 13.149,-8.813 13.712,-8.813 13.831,-8.932 13.831,-9.01 14.104,-9.284 R6.1 14.154,-9.284 14.428,-9.01 14.428,-8.932 14.547,-8.813 15.035,-8.813 15.441,-9.219 U1.7
P1_P: J5.2 R6.2 U1.6 | length 11.5
  Top Layer w0.203: J5.2 8.941,-3.299 8.941,-3.886 13.359,-8.305 13.712,-8.305 13.831,-8.186 13.831,-8.107 14.104,-7.834 R6.2 14.154,-7.834 14.428,-8.107 14.428,-8.186 14.547,-8.305 15.06,-8.305 15.416,-7.949 U1.6
P2_N: J5.7 R8.1 U2.7 | length 16.9
  Top Layer w0.203: J5.7 7.199,2.599 8.968,2.599 9.032,2.535 11.559,2.535 12.649,3.625 12.649,9.957 13.132,10.44 13.721,10.44 13.84,10.321 13.84,10.242 14.114,9.969 R8.1 14.164,9.969 14.437,10.242 14.437,10.321 14.556,10.44 15.044,10.44 15.45,10.034 U2.7
P2_P: J5.8 R8.2 U2.6 | length 14.5
  Top Layer w0.203: J5.8 9.93,3.57 10.457,3.043 11.349,3.043 12.141,3.835 12.141,10.168 12.921,10.948 13.721,10.948 13.84,11.067 13.84,11.146 14.114,11.419 R8.2 14.164,11.419 14.437,11.146 14.437,11.067 14.556,10.948 15.069,10.948 15.425,11.304 U2.6
P3_N: J5.4 R10.1 U3.7 | length 8.1
  Top Layer w0.203: J5.4 9.93,-0.51 10.457,0.017 10.634,0.017 10.901,-0.25 12.119,-0.25 13.184,0.814 13.712,0.814 13.831,0.695 13.831,0.616 14.104,0.343 R10.1 14.154,0.343 14.428,0.616 14.428,0.695 14.547,0.814 15.035,0.814 15.441,0.408 U3.7
P3_P: J5.5 R10.2 U3.6 | length 10.4
  Top Layer w0.203: J5.5 7.199,0.461 8.968,0.461 9.032,0.525 10.844,0.525 11.112,0.258 11.909,0.258 12.973,1.322 13.712,1.322 13.831,1.441 13.831,1.52 14.104,1.793 R10.2 14.154,1.793 14.428,1.52 14.428,1.441 14.547,1.322 15.06,1.322 15.416,1.678 U3.6
RJ_GND: J5.6 OC1.3 | length 24.8
  Top Layer w0.508: v1(14.173,-18.593) 14.189,-18.608 16.128,-18.608 OC1.3
  Bottom Layer w0.508: J5.6 10.941,1.53 12.217,0.254 12.217,-16.866 13.945,-18.593 v1(14.173,-18.593)
RJ_LED_EN: J5.3 R5.1 | length 19.7
  Top Layer w0.508: J5.3 5.836,-1.53 5.359,-2.007 5.359,-4.242 10.439,-9.322 10.439,-15.831 10.737,-16.129 R5.1
VIN: C2.1 C3.1 J2.1 MOD1.1 MOD1.2 P1.1 Q1.2 R2.2 | length 24.6
  Top Layer w1.27: MOD1.1 41.125,-9.665 41.125,-11.396 41.729,-12 C2.1
  Top Layer w1.524: MOD1.2 MOD1.1 40.985,-5.675 v2(42.901,-3.759)
  Bottom Layer w0.508: R2.2 37.777,-6.325 38.075,-6.027 v2(38.075,-3.759)
  Bottom Layer w0.762: MOD1.1@40.985,-9.86 MOD1.1
  Bottom Layer w1.27: C3.1 35.725,-9.512 38.432,-9.512 MOD1.2
  Bottom Layer w1.778: MOD1.2 MOD1.1
  other v1: 41.885,-3.759 38.075,-2.743 42.901,-2.743 39.345,-1.727 41.885,-1.727 38.075,-0.711 40.615,-0.711 42.901,-0.711 39.345,0.305 41.885,0.305
  other v2: 40.615,-3.759 38.075,-1.727 40.615,-1.727 42.901,-1.727 38.075,0.305 40.615,0.305 42.901,0.305
VLED: D1.1 J1.1 J3.1 J4.1 Q1.3 | length 2.9
  Bottom Layer w0.762: v1@30.952,1.651 v1(30.963,1.651) ; Q1.3 33.934,0.613 D1.1
  other v1: 30.963,-1.499 31.75,-1.499 32.537,-1.499 33.325,-1.499 34.112,-1.499 34.9,-1.499 30.963,-0.711 31.75,-0.711 32.537,-0.711 33.325,-0.711 34.112,-0.711 34.9,-0.711 30.963,0.076 31.75,0.076 30.963,0.864 31.75,0.864 31.75,1.651
pads on no net: J5.DNC P1.3 U1.1 U2.1 U3.1

## Polygon pours and split planes (outlines as drawn)
VIN on Bottom Layer "VIN_L04_P000" (solid, pour order 0): 41.504,-5.766 41.3,-5.563 38.303,-5.563 37.414,-4.674 37.414,5.055 39.243,6.883 55.753,6.883 58.471,4.166 58.471,-4.013 56.718,-5.766
VIN on Top Layer "VIN_L01_P001" (solid, pour order 1): 39.421,-5.994 37.465,-4.039 37.465,5.105 39.116,6.756 42.977,6.833 55.778,6.833 58.344,4.267 58.344,-4.115 56.464,-5.994
VLED on Layer 2 (split plane): 55.919,23.483 56.137,23.457 56.352,23.414 56.563,23.355 56.768,23.279 56.967,23.187 57.159,23.08 57.341,22.958 57.513,22.823 57.674,22.674 57.823,22.513 57.958,22.341 58.08,22.159 58.187,21.967 58.279,21.768 58.355,21.563 58.414,21.352 58.457,21.137 58.483,20.919 58.491,20.715 58.49,20.7 58.49,-20.7 58.491,-20.715 58.483,-20.919 58.457,-21.137 58.414,-21.352 58.355,-21.563 58.279,-21.768 58.187,-21.967 58.08,-22.159 57.958,-22.341 57.823,-22.513 57.674,-22.674 57.513,-22.823 57.341,-22.958 57.159,-23.08 56.967,-23.187 56.768,-23.279 56.563,-23.355 56.352,-23.414 56.137,-23.457 55.919,-23.483 55.715,-23.491 55.7,-23.49 4.3,-23.49 4.285,-23.491 4.081,-23.483 3.863,-23.457 3.648,-23.414 3.437,-23.355 3.232,-23.279 3.033,-23.187 2.841,-23.08 2.659,-22.958 2.487,-22.823 2.326,-22.674 2.177,-22.513 2.042,-22.341 1.92,-22.159 1.813,-21.967 1.721,-21.768 1.645,-21.563 1.586,-21.352 1.543,-21.137 1.517,-20.919 1.509,-20.715 1.51,-20.7 1.51,20.7 1.509,20.715 1.517,20.919 1.543,21.137 1.586,21.352 1.645,21.563 1.721,21.768 1.813,21.967 1.92,22.159 2.042,22.341 2.177,22.513 2.326,22.674 2.487,22.823 2.659,22.958 2.841,23.08 3.033,23.187 3.232,23.279 3.437,23.355 3.648,23.414 3.863,23.457 4.081,23.483 4.285,23.491 4.3,23.49 55.7,23.49 55.715,23.491
GND on Layer 1 (split plane): 55.919,23.483 56.137,23.457 56.352,23.414 56.563,23.355 56.768,23.279 56.967,23.187 57.159,23.08 57.341,22.958 57.513,22.823 57.674,22.674 57.823,22.513 57.958,22.341 58.08,22.159 58.187,21.967 58.279,21.768 58.355,21.563 58.414,21.352 58.457,21.137 58.483,20.919 58.491,20.715 58.49,20.7 58.49,-20.7 58.491,-20.715 58.483,-20.919 58.457,-21.137 58.414,-21.352 58.355,-21.563 58.279,-21.768 58.187,-21.967 58.08,-22.159 57.958,-22.341 57.823,-22.513 57.674,-22.674 57.513,-22.823 57.341,-22.958 57.159,-23.08 56.967,-23.187 56.768,-23.279 56.563,-23.355 56.352,-23.414 56.137,-23.457 55.919,-23.483 55.715,-23.491 55.7,-23.49 4.3,-23.49 4.285,-23.491 4.081,-23.483 3.863,-23.457 3.648,-23.414 3.437,-23.355 3.232,-23.279 3.033,-23.187 2.841,-23.08 2.659,-22.958 2.487,-22.823 2.326,-22.674 2.177,-22.513 2.042,-22.341 1.92,-22.159 1.813,-21.967 1.721,-21.768 1.645,-21.563 1.586,-21.352 1.543,-21.137 1.517,-20.919 1.509,-20.715 1.51,-20.7 1.51,20.7 1.509,20.715 1.517,20.919 1.543,21.137 1.586,21.352 1.645,21.563 1.721,21.768 1.813,21.967 1.92,22.159 2.042,22.341 2.177,22.513 2.326,22.674 2.487,22.823 2.659,22.958 2.841,23.08 3.033,23.187 3.232,23.279 3.437,23.355 3.648,23.414 3.863,23.457 4.081,23.483 4.285,23.491 4.3,23.49 55.7,23.49 55.715,23.491

## Other copper
Top Layer:
  rectangle net GND: 19.955,-14.182 21.718,-12.572
  region net GND: 56.499,9.896 56.271,9.668 55.89,9.668 55.407,10.15 52.791,10.15 52.512,10.43 52.689,10.608 52.689,11.268 53.324,11.268 53.68,11.624 55.407,11.624 55.89,12.106 56.271,12.106 56.499,11.878 56.499,11.751
  region net GND: 56.718,-13 56.49,-13.229 56.109,-13.229 55.626,-12.746 53.01,-12.746 52.73,-12.467 52.908,-12.289 52.908,-11.629 53.543,-11.629 53.899,-11.273 55.626,-11.273 56.109,-10.79 56.49,-10.79 56.718,-11.019 56.718,-11.146
Bottom Layer:
  region net VLED: 34.722,2.057 35.331,1.448 35.331,-1.651 35.077,-1.905 30.81,-1.905 30.556,-1.651 30.556,1.829 30.785,2.057 31.013,2.057
Layer 1 (plane layer: these items are gaps in the copper):
  rectangle: 37.414,-4.42 43.561,0.965
Layer 2 (plane layer: these items are gaps in the copper):
  rectangle: 37.414,-4.42 43.561,0.965

## Silkscreen, mask and mechanical layers (free items; w line width, h text height)
Top Overlay:
  lines w0.254: 1.427,-19.836 cw(c4.3,-20.7) 7.3,-20.7 cw(c4.3,-20.7) 5.164,-23.573 ; 1.427,19.836 ccw(c4.3,20.7) 7.3,20.7 ccw(c4.3,20.7) 5.164,23.573 ; 54.836,-23.573 cw(c55.7,-20.7) 58.573,-19.836 ; 54.836,23.573 ccw(c55.7,20.7) 58.573,19.836
  lines w1: 22.5,13.741 22.5,21.539 ; 37.5,10.897 37.5,21.539
  text "V+" at 9.15,15.29 h2
  text "GND" at 18.446,15.283 h2
  text "V+" at 39.15,15.29 h2
  text "SIG" at 13.639,15.273 h2
  text "SIG" at 42.581,15.17 h2
  text "V+" at 25.777,13.722 h3.05 r90
  text "SIG" at 30.803,12.164 h3.05 r90
  text "GND" at 35.787,11.577 h3.05 r90
Bottom Overlay:
  text "WLED" at 25.039,-0.994 h5.08
  text "DIFF" at 24.134,-5.64 h5.08
  text "RX" at 22.145,-10.182 h5.08
  text "GG 2025" at 27.415,-14.762 h5.08
Mechanical 1:
  the board outline again, w0.254